# EAGLE board IOTAssignmentMain (EAGLE 9.7.0)

Size 215.72 x 165.25 mm. Coordinates in mm from the lower left corner, seen from the top.
Outline: 0,0 215.72,0 215.72,165.25 0,165.25 0,0
Copper layers (1*16): Top 0.035mm / dielectric 1.5mm / Bottom 0.035mm
Design rules "default": minimum track width 6mil, minimum drill 0.35mm, track to track 6mil, track to pad 6mil, pad to pad 6mil, via to via 6mil, smd to smd 6mil, copper to edge 40mil, drill to drill 6mil, minimum pad ring 10mil, minimum via ring 8mil, stop-mask expansion 4mil, vias tented up to drill 0mil, thermal gap 10mil

## Footprints (pad centres in the part's own frame; a part is rotated, then mirrored left to right if it is on the bottom)
BAT_3002 = smd 3.96 x 3.96: N 0,0.65 | smd 5.08 x 5.08: P 12.825,0.65; P1 -12.825,0.65
LEDRD254W60D565H860B = drill 0.981 pad 1.581: 1 -1.27,0; 2 1.27,0
HC-SR04 = drill 1.016 long: 1 -3.81,0; 2 -1.27,0; 3 1.27,0; 4 3.81,0
RESAD1016W63L850D250B = drill 0.83 pad 1.43: 1 -5.08,0; 2 5.08,0
SM-S2309S = drill 1.016 long: 1 -2.54,0; 2 0,0; 3 2.54,0
ARDUINO-UNO-R3-SHIELD = drill 1.016 pad 1.88: 3.3V 24.13,-2.54; 5V 24.13,0; A0 24.13,12.7; A1 24.13,15.24; A2 24.13,17.78; A3 24.13,20.32; A4 24.13,22.86; A5 24.13,25.4; AREF -24.13,-13.97; D2 -24.13,20.32; D3 -24.13,17.78; D4 -24.13,15.24; D5 -24.13,12.7; D6 -24.13,10.16; D7 -24.13,7.62; D8 -24.13,3.81; D9 -24.13,1.27; D10 -24.13,-1.27; D11 -24.13,-3.81; D12 -24.13,-6.35; D13 -24.13,-8.89; GND@0 24.13,2.54; GND@1 24.13,5.08; GND@2 -24.13,-11.43; IOREF 24.13,-7.62; NC 24.13,-10.16; RES 24.13,-5.08; RX -24.13,25.4; SCL -24.13,-19.05; SDA -24.13,-16.51; TX -24.13,22.86; VIN 24.13,7.62
1X08 = drill 1.016 long: 1 -8.89,0; 2 -6.35,0; 3 -3.81,0; 4 -1.27,0; 5 1.27,0; 6 3.81,0; 7 6.35,0; 8 8.89,0

## Placement (x,y rotation side)
BAT1  BR2016  [BAT_3002]  195.52,149.49 0 top
D1  RED  [LEDRD254W60D565H860B]  148.47,106.08 180 top
DIST1  DISTANCE-SENSOR-4PINHC-SR04  [HC-SR04]  94.67,121.94 0 top
DIST2  DISTANCE-SENSOR-4PINHC-SR04  [HC-SR04]  170.39,22.23 0 top
R1  1k  [RESAD1016W63L850D250B]  149.74,98.46 90 top
SERVO1  SERVOSM-S2309S  [SM-S2309S]  92.73,92.51 0 top
U1  ARDUINO-UNO-R3-SHIELD  [ARDUINO-UNO-R3-SHIELD]  29.84,95.47 180 top
U2  PINHD-1X08_1X08M  [1X08]  143.79,157.55 0 top

## Library data of the parts
BAT1 = Tinkercad; CATEGORY: Battery-Holder; CELL_DIAMETER: 20mm; DESCRIPTION: Battery Retainer Coin, 20.0mm 1 Cell SMD (SMT) Tab; MANUFACTURER: Keystone Electronics; MPN: 3002; PART_STATUS: ACTIVE; ROHS_COMPLIANT: COMPLIANT; SERIES: -; SUB_CATEGORY: Holder; TYPE: Coin Cell
D1 = Tinkercad; CATEGORY: Opto-Electronic; SUB-CATEGORY: LED; VALUE: LED_RED
DIST1 DIST2 R1 SERVO1 U1 U2 = Tinkercad

## Nets
BAT1+: BAT1.P BAT1.P1 U2.1
BAT1-: BAT1.N U2.2
D1_A: D1.1 R1.2
U1_5V: DIST1.1 DIST2.1 SERVO1.1 U1.5V
U1_D2: SERVO1.2 U1.D2
U1_D4: DIST1.3 U1.D4
U1_D5: DIST1.2 U1.D5
U1_D6: DIST2.2 U1.D6
U1_D7: DIST2.3 U1.D7
U1_D8: R1.1 U1.D8
U1_GND: D1.2 DIST1.4 DIST2.4 SERVO1.3 U1.GND@0 U1.GND@1 U1.GND@2
U2_3: U1.RX U2.3
U2_8: U1.TX U2.8

## Tracks (layer width: path | path; a pad name or v marks a point on that pad's centre or on a via)
BAT1+  (2 unrouted)
BAT1-  (1 unrouted)
D1_A  (1 unrouted)
U1_5V  (3 unrouted)
U1_D2  (1 unrouted)
U1_D4  (1 unrouted)
U1_D5  (1 unrouted)
U1_D6  (1 unrouted)
U1_D7  (1 unrouted)
U1_D8  (1 unrouted)
U1_GND  (6 unrouted)
U2_3  (1 unrouted)
U2_8  (1 unrouted)